# EAGLE board GUN PCB - BOARD (EAGLE 9.7.0)
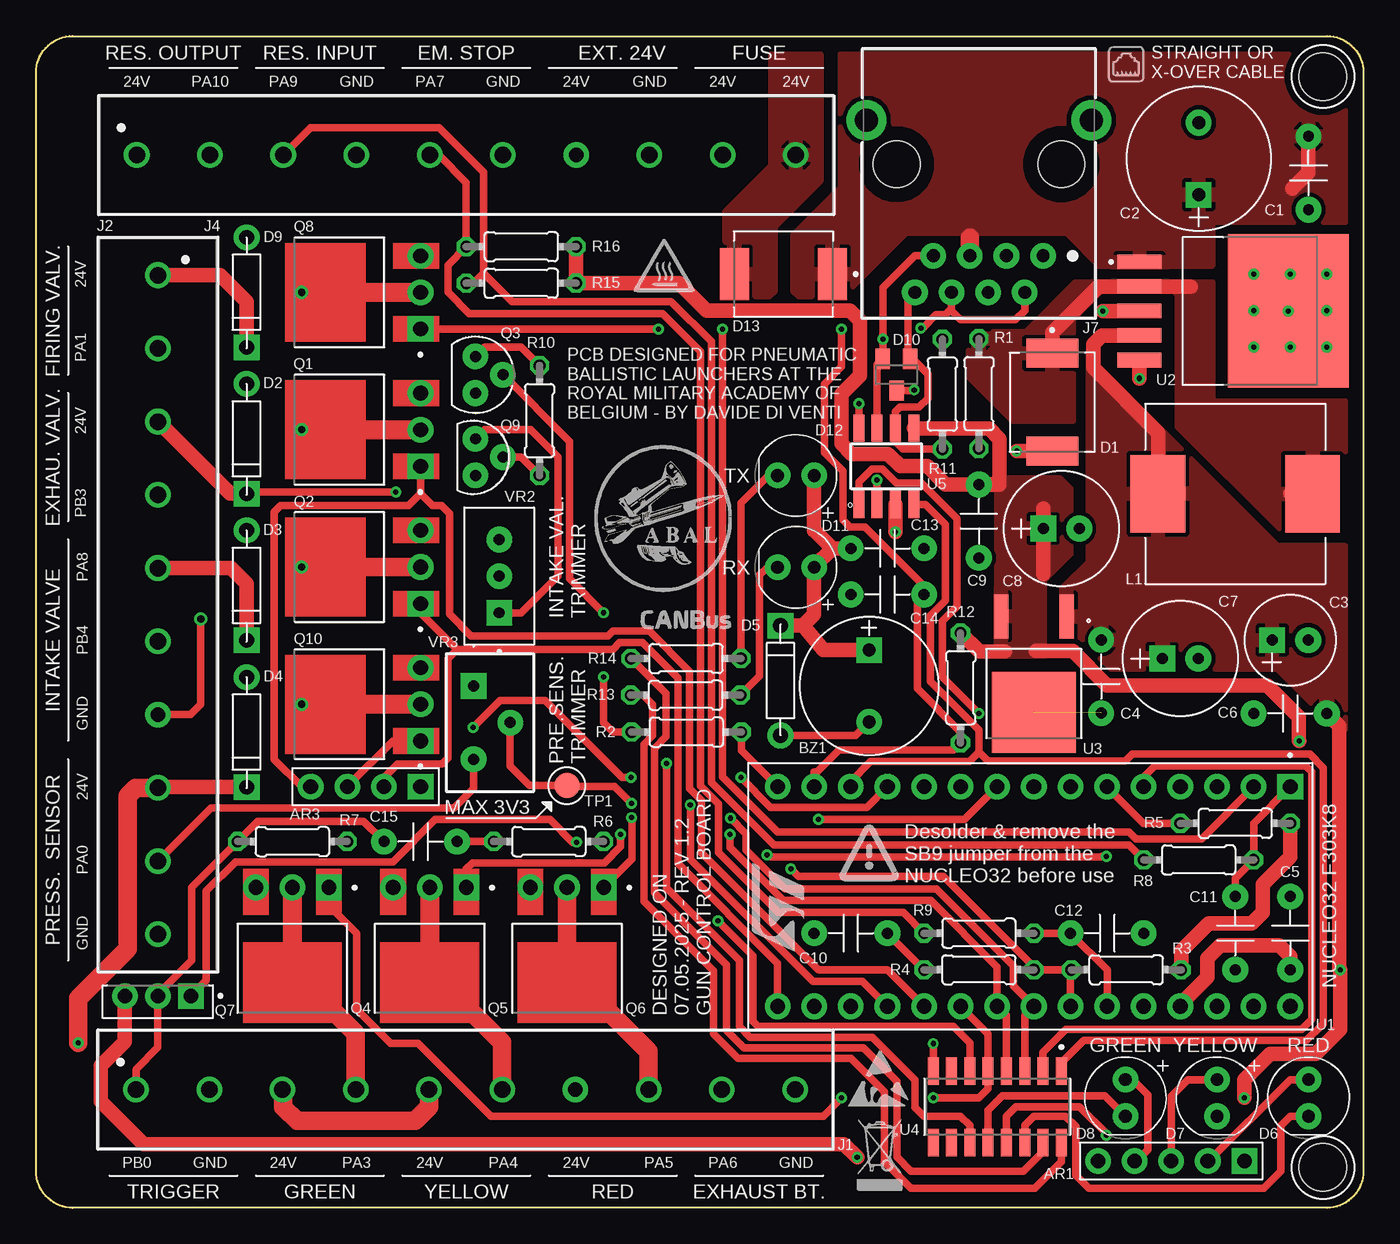
[diagram p0: board, top side]
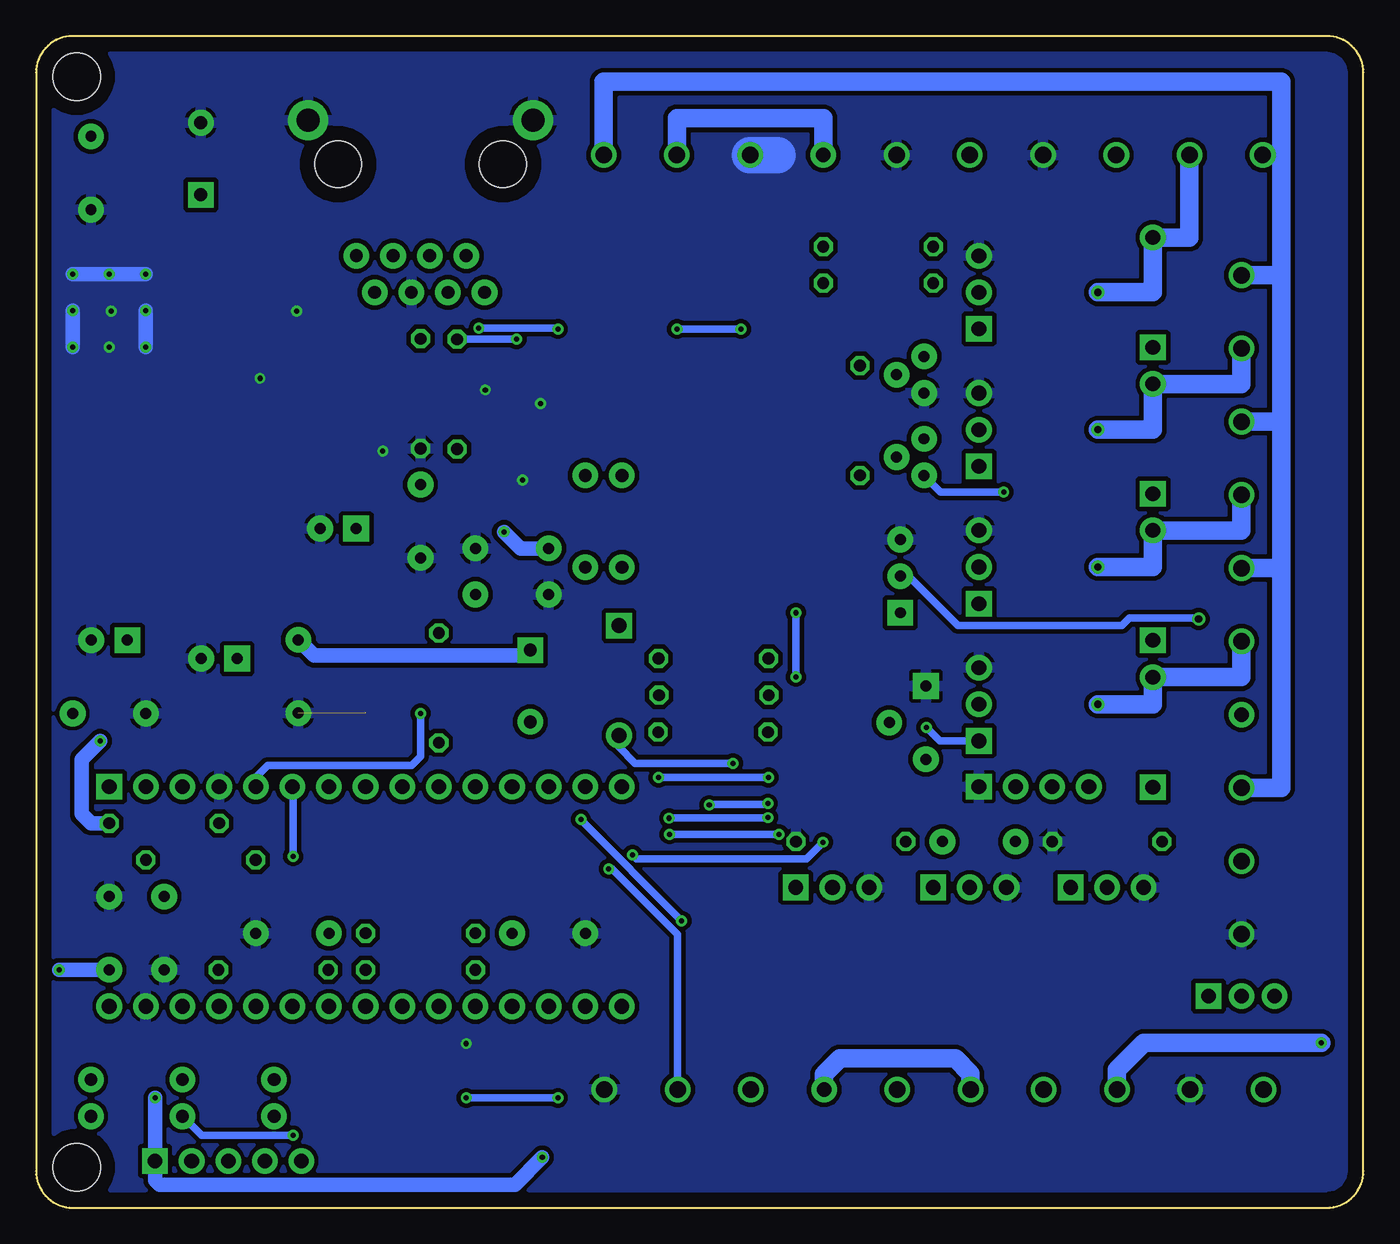
[diagram p1: board, bottom side, seen from below]

Size 92.08 x 81.28 mm. Coordinates in mm from the lower left corner, seen from the top.
Outline: 0,2.54 0,78.74 arc-90 2.54,81.28 89.53,81.28 arc-90 92.08,78.74 92.08,2.54 arc-90 89.53,0 2.54,0 arc-90 0,2.54
Copper layers (1*16): Top / Bottom
Stack-up Default Layer Stack: Top User Defined 0.035mm / Dielectric-1 User Defined 1.5mm / Bottom User Defined 0.035mm
Design rules: minimum copper width 6mil, minimum drill size 0.35mm, copper clearance wire_polygon to wire_polygon 6mil, copper clearance wire_polygon to pad_smd 6mil, copper clearance wire_polygon to via 6mil, copper clearance pad_smd to pad_smd 6mil, copper clearance pad_smd to via 6mil, copper clearance via to via 6mil, copper clearance smd to pad (same net) 6mil, copper clearance smd to via (same net) 6mil, copper clearance smd to smd (same net) 6mil, dimension clearance 40mil, via restrict clearance 0mil, restrict clearance 0mil, drill distance 6mil, keepout clearance 0mil
Holes 3.3 mm at 89.27,78.47 89.27,2.81

## Footprints (pad centres in the part's own frame; a part is rotated, then mirrored left to right if it is on the bottom)
470 = drill 1.016 pad 1.778 square: 1 -5.08,0 | drill 1.016 pad 1.778: 2 -2.54,0; 3 0,0; 4 2.54,0; 5 5.08,0
10K = drill 1.016 pad 1.778 square: 1 -3.81,0 | drill 1.016 pad 1.778: 2 -1.27,0; 3 1.27,0; 4 3.81,0
XDCR_KSSG1201-16 = drill 0.889 pad 1.778: N 2.489,0 | drill 0.889 pad 1.778 square: P -2.489,0
CAPRR508W50L508T317H508 = drill 0.762 pad 1.778: 1 -2.54,0; 2 2.54,0
CAPPRD500W60D1000H2000 = drill 0.889 pad 1.778: N 2.5,0 | drill 0.889 pad 1.778 square: P -2.5,0
CAPPRD250W50D630H1120 = drill 0.762 pad 1.778: N 1.25,0 | drill 0.762 pad 1.778 square: P -1.25,0
CAPPRD250W45D800H500 = drill 0.762 pad 1.778: N 1.25,0 | drill 0.762 pad 1.778 square: P -1.25,0
DIO_SS34 = smd 2 x 3.6: A 3.4,0; C -3.4,0
DIOAD1060W80L520D270 = drill 1.016 pad 1.778: A 3.81,0 | drill 1.016 pad 1.778 square: C -3.81,0
LEDRD254W60D565H860B_R = drill 0.889 pad 1.778: A -1.27,0; C 1.27,0
LEDRD254W60D565H860B_Y = drill 0.889 pad 1.778: A -1.27,0; C 1.27,0
LEDRD254W60D565H860B_W = drill 0.889 pad 1.778: A -1.27,0; C 1.27,0
SOT23 = smd 1 x 1.4: 1 -0.95,-1.1; 2 0.95,-1.1; 3 0,1.1
691241510010 = drill 1.143 pad 1.778: 1 -22.86,0; 2 -17.78,0; 3 -12.7,0; 4 -7.62,0; 5 -2.54,0; 6 2.54,0; 8 12.7,0; 9 17.78,0; 10 22.86,0 | drill 1.016 pad 1.778: 7 7.62,0
615008140121 = drill 0.889 pad 1.778: 1 -4.445,6.35; 2 -3.175,8.89; 3 -1.905,6.35; 4 -0.635,8.89; 5 0.635,6.35; 6 1.905,8.89; 8 4.445,8.89 | drill 0.9 pad 1.778: 7 3.175,6.35 | drill 1.6 pad 2.794: S1 -7.8,-3.05; S2 7.8,-3.05 | hole 3.25: -5.715,0; 5.715,0
INDP125125X600N = smd 3.81 x 5.4: 1 -5.358,0; 2 5.358,0
TRANS_IRF520NSTRL = drill 1.016 pad 1.778 square: 1 -2.54,-5.715 | drill 1.016 pad 1.778: 2 0,-5.715; 3 2.54,-5.715
TO92 = drill 0.762 pad 1.778: 1 1.27,0; 2 0,1.905; 3 -1.27,0
TO229P673X239X978-3N = drill 1.016 pad 1.778 square: 1 -2.29,-0.407 | drill 1.016 pad 1.778: 2 0,-0.407; 3 2.29,-0.407
TO92254P460H750-3 = drill 0.762 pad 1.778: 1 -1.27,0; 2 0,1.905; 3 1.27,0
0204/7 = drill 0.813 octagon: 1 -3.81,0; 2 3.81,0
TP355X200 = smd 1.778 x 1.778: 1 0,0
MODULE_NUCLEO-F042K6 = drill 1.016 pad 1.778 square: CN3_1 -7.62,16.256 | drill 1.016 pad 1.778: CN3_2 -7.62,13.716; CN3_3 -7.62,11.176; CN3_4 -7.62,8.636; CN3_5 -7.62,6.096; CN3_6 -7.62,3.556; CN3_7 -7.62,1.016; CN3_8 -7.62,-1.524; CN3_9 -7.62,-4.064; CN3_10 -7.62,-6.604; CN3_11 -7.62,-9.144; CN3_12 -7.62,-11.684; CN3_13 -7.62,-14.224; CN3_14 -7.62,-16.764; CN3_15 -7.62,-19.304; CN4_1 7.62,16.256; CN4_2 7.62,13.716; CN4_3 7.62,11.176; CN4_4 7.62,8.636; CN4_5 7.62,6.096; CN4_6 7.62,3.556; CN4_7 7.62,1.016; CN4_8 7.62,-1.524; CN4_9 7.62,-4.064; CN4_10 7.62,-6.604; CN4_11 7.62,-9.144; CN4_12 7.62,-11.684; CN4_13 7.62,-14.224; CN4_14 7.62,-16.764; CN4_15 7.62,-19.304
CONV_LM2596DSADJG = smd 3.05 x 1.016: 1 -6.485,3.404; 2 -6.485,1.702; 3 -6.485,0; 4 -6.485,-1.702; 5 -6.485,-3.404 | smd 8.38 x 10.66: 6 3.82,0
DPAK = smd 3.048 x 1.016: 1 -5.47,2.28; 3 -5.47,-2.28 | smd 5.588 x 5.842: 2 1.2,0
SOIC127P600X175-16N = smd 1.905 x 0.762: 1 -2.475,4.445; 2 -2.475,3.175; 3 -2.475,1.905; 4 -2.475,0.635; 5 -2.475,-0.635; 6 -2.475,-1.905; 7 -2.475,-3.175; 8 -2.475,-4.445; 9 2.475,-4.445; 10 2.475,-3.175; 11 2.475,-1.905; 12 2.475,-0.635; 13 2.475,0.635; 14 2.475,1.905; 15 2.475,3.175; 16 2.475,4.445
SOIC127P600X175-8N = smd 1.905 x 0.762: 1 -2.65,1.905; 2 -2.65,0.635; 3 -2.65,-0.635; 4 -2.65,-1.905; 5 2.65,-1.905; 6 2.65,-0.635; 7 2.65,0.635; 8 2.65,1.905
TRIM_3296W-1-502 = drill 0.762 pad 1.778 square: 1 -2.54,0 | drill 0.762 pad 1.778: 2 0,0; 3 2.54,0
3299Y1104LF = drill 0.762 pad 1.778 square: 1 0,0 | drill 0.762 pad 1.778: 2 2.54,-2.54; 3 0,-5.08

## Placement (x,y rotation side)
AR1  470  [470]  78.74,3.25 180 top
AR3  10K10KX4  [10K]  22.86,29.21 180 top
BZ1  KSSG1201-16  [XDCR_KSSG1201-16]  57.78,36.2 270 top
C1  SR211C104KARTR1  [CAPRR508W50L508T317H508]  88.27,71.78 90 top
C2  ECA2CHG220  [CAPPRD500W60D1000H2000]  80.64,72.77 90 top
C3  EEUFC1E101SH  [CAPPRD250W50D630H1120]  86.99,39.37 0 top
C4  SR211C104KARTR1  [CAPRR508W50L508T317H508]  73.89,36.86 90 top
C5  SR211C104KARTR1  [CAPRR508W50L508T317H508]  86.99,19.05 270 top
C6  SR211C104KARTR1  [CAPRR508W50L508T317H508]  86.99,34.29 0 top
C7  ECEA1VKS470  [CAPPRD250W45D800H500]  79.38,38.1 0 top
C8  ECEA1VKS470  [CAPPRD250W45D800H500]  71.12,47.12 0 top
C9  SR211C104KARTR1  [CAPRR508W50L508T317H508]  65.41,47.62 90 top
C10  SR211C104KARTR1  [CAPRR508W50L508T317H508]  56.52,19.05 0 top
C11  SR211C104KARTR1  [CAPRR508W50L508T317H508]  83.19,19.05 90 top
C12  SR211C104KARTR1  [CAPRR508W50L508T317H508]  74.3,19.05 180 top
C13  SR211C104KARTR1  [CAPRR508W50L508T317H508]  59.05,45.75 180 top
C14  SR211C104KARTR1  [CAPRR508W50L508T317H508]  59.05,42.55 0 top
C15  SR211C104KARTR1  [CAPRR508W50L508T317H508]  26.67,25.4 180 top
D1  SS34  [DIO_SS34]  70.48,55.88 270 top
D2  1N4007  [DIOAD1060W80L520D270]  14.61,53.34 90 top
D3  1N4007  [DIOAD1060W80L520D270]  14.61,43.18 90 top
D4  1N4007  [DIOAD1060W80L520D270]  14.61,32.99 90 top
D5  1N4007  [DIOAD1060W80L520D270]  51.64,36.58 270 top
D6  LED_RADIALRED  [LEDRD254W60D565H860B_R]  88.27,7.62 270 top
D7  LED_RADIALYELLOW  [LEDRD254W60D565H860B_Y]  81.91,7.62 270 top
D8  LED_RADIALWHITE  [LEDRD254W60D565H860B_W]  75.56,7.62 270 top
D9  1N4007  [DIOAD1060W80L520D270]  14.61,63.5 90 top
D10  SM712.TCT  [SOT23]  59.69,57.78 180 top
D11  LED_RADIALYELLOW  [LEDRD254W60D565H860B_Y]  52.7,44.42 180 top
D12  LED_RADIALYELLOW  [LEDRD254W60D565H860B_Y]  52.7,50.8 180 top
D13  SS34  [DIO_SS34]  51.85,64.77 180 top
J1  691241510010  [691241510010]  29.79,8.2 0 top
J2  691241510010  [691241510010]  29.85,73.03 0 top
J4  691241510010  [691241510010]  8.46,41.83 270 top
J7  615008140121  [615008140121]  65.41,72.39 180 top
L1  SRR1260-330M  [INDP125125X600N]  83.19,49.53 0 top
Q1  IRF520NSTRL  [TRANS_IRF520NSTRL]  20.96,53.98 90 top
Q2  IRF520NSTRL  [TRANS_IRF520NSTRL]  20.96,44.45 90 top
Q3  BC547  [TO92]  30.48,57.78 270 top
Q4  IRF520NSTRL  [TRANS_IRF520NSTRL]  17.78,16.51 180 top
Q5  IRF520NSTRL  [TRANS_IRF520NSTRL]  27.3,16.51 180 top
Q6  IRF520NSTRL  [TRANS_IRF520NSTRL]  36.83,16.51 180 top
Q7  IRFU9220  [TO229P673X239X978-3N]  8.45,14.29 180 top
Q8  IRF520NSTRL  [TRANS_IRF520NSTRL]  20.96,63.5 90 top
Q9  BC557B  [TO92254P460H750-3]  30.48,52.07 270 top
Q10  IRF520NSTRL  [TRANS_IRF520NSTRL]  20.96,34.92 90 top
R1  10k  [0204/7]  65.41,56.47 270 top
R2  2.2k  [0204/7]  45.11,32.99 180 top
R3  1k  [0204/7]  75.62,16.51 0 top
R4  1k  [0204/7]  65.41,16.51 0 top
R5  2.2k  [0204/7]  83.19,26.67 0 top
R6  1k  [0204/7]  35.56,25.4 180 top
R7  1k  [0204/7]  17.78,25.4 180 top
R8  1k  [0204/7]  80.64,24.13 180 top
R9  1k  [0204/7]  65.41,19.05 180 top
R10  2.2k  [0204/7]  34.92,54.61 270 top
R11  120  [0204/7]  62.86,56.44 90 top
R12  1k  [0204/7]  64.14,36.07 270 top
R13  330  [0204/7]  45.06,35.56 0 top
R14  330  [0204/7]  45.08,38.1 0 top
R15  10k  [0204/7]  33.66,64.14 0 top
R16  10k  [0204/7]  33.66,66.67 0 top
TP1  TP  [TP355X200]  36.83,29.29 0 top
U1  NUCLEO-F042K6  [MODULE_NUCLEO-F042K6]  70.74,21.59 270 top
U2  LM2596DSADJG  [CONV_LM2596DSADJG]  83.03,62.21 0 top
U3  LD39150DT33-R  [DPAK]  69.22,35.56 270 top
U4  ULN2003LVDR  [SOIC127P600X175-16N]  66.67,7.01 270 top
U5  MCP2562-E/SN  [SOIC127P600X175-8N]  58.98,51.44 90 top
VR2  3296W-1-502  [TRIM_3296W-1-502]  32.13,43.81 90 top
VR3  3299Y-1-104LF  [3299Y1104LF]  30.35,36.2 0 top

## Library data of the parts
AR1 = Network resistors 470 x4
AR3 = Network resistors 10k x3
BZ1 = Buzzer; AVAILABILITY: In Stock; CHECK_PRICES: https://www.snapeda.com/parts/KSSG1201-16/Kingstate/view-part/?ref=eda; DESCRIPTION: MAGNETIC TRANSDUCER, PCB; Transducer Function:Buzzer; Supply Voltage Min:1V; Supply Voltage Max:-; Current Rating:35mA; Tones:-; Sound Level SPL:85dB; Resonant Frequency:2kHz; Transducer Mounting:-; Product Range:-; SVHC:No SVHC RoHS Compliant: Yes; MF: Kingstate; MP: KSSG1201-16; PACKAGE: None; PRICE: None; SNAPEDA_LINK: https://www.snapeda.com/parts/KSSG1201-16/Kingstate/view-part/?ref=snap
C1 C4-C6 C9-C15 = 100nF; AVAILABILITY: In Stock; CHECK_PRICES: https://www.snapeda.com/parts/SR211C104KARTR1/AVX/view-part/?ref=eda; DESCRIPTION: 0.1 µF ±10% 100V Ceramic Capacitor X7R Radial; MF: AVX; MP: SR211C104KARTR1; PACKAGE: Radial AVX Interconnect / Elco; PRICE: None; SNAPEDA_LINK: https://www.snapeda.com/parts/SR211C104KARTR1/AVX/view-part/?ref=snap
C2 = 680uF 35V; AVAILABILITY: In Stock; CHECK_PRICES: https://www.snapeda.com/parts/ECA2CHG220/Panasonic/view-part/?ref=eda; DESCRIPTION: Capacitor; Alum Electrolytic; Cap 22 uF; Tol 20%; Vol-Rtg 160 VDC; Radial; 10x20; Bulk; MF: Panasonic; MP: ECA2CHG220; PACKAGE: RADIAL-2 Panasonic; PRICE: None; SNAPEDA_LINK: https://www.snapeda.com/parts/ECA2CHG220/Panasonic/view-part/?ref=snap
C3 = 220uF 10V; AVAILABILITY: In Stock; CHECK_PRICES: https://www.snapeda.com/parts/EEU-FC1E101SH/Panasonic/view-part/?ref=eda; DESCRIPTION: Capacitor,Alum Lytic,Cap 100 uF,Tol 20%,Vol-Rtg 25 VDC,Radial,6.3x11,Tape&Box | Panasonic Electronic Components EEU-FC1E101SH; MF: Panasonic; MP: EEU-FC1E101SH; PACKAGE: RADIAL-2 Panasonic; PRICE: None; SNAPEDA_LINK: https://www.snapeda.com/parts/EEU-FC1E101SH/Panasonic/view-part/?ref=snap
C7 C8 = 100uF 25V; AVAILABILITY: In Stock; CHECK_PRICES: https://www.snapeda.com/parts/ECE-A1VKS470/Panasonic/view-part/?ref=eda; DESCRIPTION: Capacitor,Alum Electrolytic,Cap 47 uF,Tol 20%,Vol-Rtg 35 VDC,Radial,8x5,Bulk | Panasonic Electronic Components ECE-A1VKS470; MF: Panasonic; MP: ECE-A1VKS470; PACKAGE: RADIAL-2 Panasonic; PRICE: None; SNAPEDA_LINK: https://www.snapeda.com/parts/ECE-A1VKS470/Panasonic/view-part/?ref=snap
D1 D13 = SS34; AVAILABILITY: In Stock; CHECK_PRICES: https://www.snapeda.com/parts/SS34/taiwan/view-part/?ref=eda; DESCRIPTION: 3A, 40V, Schottky Rectifier; MF: Taiwan Semiconductor; MP: SS34; PACKAGE: DO-214AB-2 Taiwan Semiconductor; PRICE: None; SNAPEDA_LINK: https://www.snapeda.com/parts/SS34/taiwan/view-part/?ref=snap
D2-D5 D9 = 1N4007; AVAILABILITY: In Stock; CHECK_PRICES: https://www.snapeda.com/parts/1N4007/Diotec/view-part/?ref=eda; DESCRIPTION: Diode, DO-41, 1000V, 1A, 175°C; MF: Diotec Semiconductor; MP: 1N4007; PACKAGE: DO-41 Diotec; PRICE: None; SNAPEDA_LINK: https://www.snapeda.com/parts/1N4007/Diotec/view-part/?ref=snap
D6-D8 D11 D12 = LED
D10 = SM712; AVAILABILITY: In Stock; CHECK_PRICES: https://www.snapeda.com/parts/SM712.TCT/Semtech/view-part/?ref=eda; DESCRIPTION: SM Series 12 V 400 W Asymmetrical TVS Diode for Extended Common-Mode - SOT-23; MF: Semtech Corporation; MP: SM712.TCT; PACKAGE: SOT-23 Semtech; PRICE: None; SNAPEDA_LINK: https://www.snapeda.com/parts/SM712.TCT/Semtech/view-part/?ref=snap
J1 J2 J4 = Bornier 10 contacts; AVAILABILITY: In Stock; CHECK_PRICES: https://www.snapeda.com/parts/691241510010/W%25C3%25BCrth+Elektronik+Midcom/view-part/?ref=eda; DESCRIPTION: 10 Position Wire to Board Terminal Block Horizontal with Board 0.200 (5.08mm) Through Hole; MF: Würth Elektronik; MP: 691241510010; PACKAGE: None; PRICE: None; SNAPEDA_LINK: https://www.snapeda.com/parts/691241510010/W%25C3%25BCrth+Elektronik+Midcom/view-part/?ref=snap
J7 = Ethernet connector; AVAILABILITY: In Stock; CHECK_PRICES: https://www.snapeda.com/parts/615008140121/Wurth+Electronics/view-part/?ref=eda; DESCRIPTION: ModularJack_8P8C_THT_Horizontal_Shielded_Tab Down; MF: Wurth Elektronik; MP: 615008140121; PACKAGE: None; PRICE: None; SNAPEDA_LINK: https://www.snapeda.com/parts/615008140121/Wurth+Electronics/view-part/?ref=snap
L1 = 33uH 3A; AVAILABILITY: In Stock; CHECK_PRICES: https://www.snapeda.com/parts/SRR1260-330M/Bourns/view-part/?ref=eda; DESCRIPTION: 33 µH Shielded Drum Core, Wirewound Inductor 3 A 60mOhm Max Nonstandard; MF: Bourns - J.W. Miller; MP: SRR1260-330M; PACKAGE: Nonstandard Bourns - J.W. Miller; PRICE: None; SNAPEDA_LINK: https://www.snapeda.com/parts/SRR1260-330M/Bourns/view-part/?ref=snap
Q1 Q2 Q4-Q6 Q8 Q10 = IRF520N SMD/DIP; AVAILABILITY: In Stock; CHECK_PRICES: https://www.snapeda.com/parts/IRF520NSTRL/Infineon/view-part/?ref=eda; DESCRIPTION: N-Channel 100 V 9.7A (Tc) 3.8W (Ta), 48W (Tc) Surface Mount D2PAK; MF: Infineon Technologies; MP: IRF520NSTRL; PACKAGE: None; PRICE: None; SNAPEDA_LINK: https://www.snapeda.com/parts/IRF520NSTRL/Infineon/view-part/?ref=snap
Q3 = BC547; AVAILABILITY: In Stock; CHECK_PRICES: https://www.snapeda.com/parts/BC547/Onsemi/view-part/?ref=eda; DESCRIPTION: Trans GP BJT NPN 45V 0.1A 500mW 3-Pin TO-92 T/R; MF: ON Semiconductor; MP: BC547; PACKAGE: None; PRICE: None; SNAPEDA_LINK: https://www.snapeda.com/parts/BC547/Onsemi/view-part/?ref=snap
Q7 = IRFU9220; AVAILABILITY: In Stock; CHECK_PRICES: https://www.snapeda.com/parts/IRFU9310PBF/Vishay/view-part/?ref=eda; DESCRIPTION: P-Channel 400 V 1.8A (Tc) 50W (Tc) Through Hole TO-251AA; MF: Vishay Siliconix; MP: IRFU9310PBF; PACKAGE: TO-251 Vishay; PRICE: None; SNAPEDA_LINK: https://www.snapeda.com/parts/IRFU9310PBF/Vishay/view-part/?ref=snap
Q9 = BC557B; AVAILABILITY: In Stock; CHECK_PRICES: https://www.snapeda.com/parts/BC557B/Diotec/view-part/?ref=eda; DESCRIPTION: BJT, TO-92, 45V, 100mA, PNP, 0.5W, 150°C; MF: Diotec Semiconductor; MP: BC557B; PACKAGE: TO-92 Diotec; PRICE: None; SNAPEDA_LINK: https://www.snapeda.com/parts/BC557B/Diotec/view-part/?ref=snap
R1-R16 = rcl; SPICEPREFIX: R
TP1 = PROBE_POINT; AVAILABILITY: In Stock; CHECK_PRICES: https://www.snapeda.com/parts/RCW0C/TE+Connectivity/view-part/?ref=eda; DESCRIPTION: TEST POINT, 1206 CASE SIZE; Accessory Type:SMD Circuit Probe Pad; For Use With:-; SVHC:No SVHC (27-Jun-2018); Board Connector / Footprint:Test Point; Current Rating:2A; External Depth:1.6mm; External Length / Height:2mm; External Width:2.3mm; Height:2mm; Operating Temperature Max:125°C; Operating Temperature Min:-55°C; Product Range:Tyco RC Series; MF: TE Connectivity; MP: RCW0C; PACKAGE: None; PRICE: None; SNAPEDA_LINK: https://www.snapeda.com/parts/RCW0C/TE+Connectivity/view-part/?ref=snap
U1 = NUCLEO-F303K8; AVAILABILITY: In Stock; CHECK_PRICES: https://www.snapeda.com/parts/NUCLEO-F042K6/STMicroelectronics/view-part/?ref=eda; DESCRIPTION: STM32F042K6, mbed-Enabled Development Nucleo-32 STM32F0 ARM® Cortex®-M0 MCU 32-Bit Embedded Evaluation Board; MF: STMicroelectronics; MP: NUCLEO-F042K6; PACKAGE: None; PRICE: None; SNAPEDA_LINK: https://www.snapeda.com/parts/NUCLEO-F042K6/STMicroelectronics/view-part/?ref=snap
U2 = LM2596; AVAILABILITY: In Stock; CHECK_PRICES: https://www.snapeda.com/parts/LM2596DSADJG/Onsemi/view-part/?ref=eda; DESCRIPTION: LM2596DSADJG Switching Regulator 3A Adjustable, 1.23 to 37 V, 5-Pin D2PAK | ON Semiconductor LM2596DSADJG; MF: ON Semiconductor; MP: LM2596DSADJG; PACKAGE: D2PAK-5 ON Semiconductor; PRICE: None; SNAPEDA_LINK: https://www.snapeda.com/parts/LM2596DSADJG/Onsemi/view-part/?ref=snap
U3 = 3V3 regulator; AVAILABILITY: In Stock; CHECK_PRICES: https://www.snapeda.com/parts/IPB60R165CP/Infineon/view-part/?ref=eda; DESCRIPTION: N-Channel 600 V 21A (Tc) 192W (Tc) Surface Mount PG-TO263-3-2; MF: Infineon; MP: IPB60R165CP; PACKAGE: TO-263 Infineon; PRICE: None; SNAPEDA_LINK: https://www.snapeda.com/parts/IPB60R165CP/Infineon/view-part/?ref=snap
U4 = ULN2003; AVAILABILITY: In Stock; CHECK_PRICES: https://www.snapeda.com/parts/ULN2003LVDR/Texas+Instruments/view-part/?ref=eda; DESCRIPTION: 50-V, 7-ch NMOS array low-side driver; MF: Texas Instruments; MP: ULN2003LVDR; PACKAGE: SOIC-16 Texas Instruments; PRICE: None; SNAPEDA_LINK: https://www.snapeda.com/parts/ULN2003LVDR/Texas+Instruments/view-part/?ref=snap
U5 = MCP2562; AVAILABILITY: In Stock; CHECK_PRICES: https://www.snapeda.com/parts/MCP2562-E/SN/Microchip/view-part/?ref=eda; DESCRIPTION: Microchip MCP2562-E/SN,CAN Transceiver 1MBps 1-channel IEC 61000-4-2,8-Pin SOIC | Microchip Technology Inc. MCP2562-E/SN; MF: Microchip; MP: MCP2562-E/SN; PACKAGE: SO-8 Microchip; PRICE: None; SNAPEDA_LINK: https://www.snapeda.com/parts/MCP2562-E/SN/Microchip/view-part/?ref=snap
VR2 = Trimmer 1k; AVAILABILITY: In Stock; CHECK_PRICES: https://www.snapeda.com/parts/3296W-1-502/Bourns/view-part/?ref=eda; DESCRIPTION: NON-RoHS, 3/8 Sq, Thru-Hole, TRIMMER, 5 Kohms, Cermet, 25 Turns, Pwr-Rtg 0.5W | Bourns 3296W-1-502; MF: Bourns; MP: 3296W-1-502; PACKAGE: NON STANDARD-3 Bourns; PRICE: None; SNAPEDA_LINK: https://www.snapeda.com/parts/3296W-1-502/Bourns/view-part/?ref=snap
VR3 = Trimmer 10k; AVAILABILITY: In Stock; CHECK_PRICES: https://www.snapeda.com/parts/3299Y-1-104LF/Bourns/view-part/?ref=eda; DESCRIPTION: Trimmer, Cermet, Rest 100 Kilohms, PCB, 25 Turns, Pwr-Rtg 0.5W | Bourns 3299Y-1-104LF; MF: Bourns; MP: 3299Y-1-104LF; PACKAGE: DIP-3 Bourns; PRICE: None; SNAPEDA_LINK: https://www.snapeda.com/parts/3299Y-1-104LF/Bourns/view-part/?ref=snap

## Nets
24V: D2.C D3.C D4.C D9.C D13.A J1.3 J1.5 J1.7 J2.1 J2.10 J4.1 J4.3 J4.5 J4.8 Q9.3
24V_+: J2.7 J2.9
24V_SAFE: C1.2 C2.P D13.C J7.5 U2.1
+3.3V: C8.P C9.2 R3.2 R5.2 R12.1 R15.2 R16.2 U3.3 U5.5
+3V3: U1.CN4_14
+5V: AR1.1 BZ1.P C3.P C4.2 C5.2 C6.2 C7.P C13.2 D5.C D11.A D12.A L1.1 Q7.3 U1.CN4_4 U2.4 U3.1 U5.3
BUZZER: BZ1.N D5.A U4.11
CANH: D10.2 J7.7 R11.2 U5.7
CANL: D10.1 J7.8 R11.1 U5.6
CANRX_LED: R13.1 U4.16
CANTX_LED: R14.1 U4.15
ELECTROMAGNET_2: D9.A J2.2 Q8.2
EM.STOP_1: J2.5 R9.2 R16.1
END.STOP_1: J2.3 R8.2 R15.1
EXHAUST_2: D3.A J4.4 Q2.2
FIRING_2: D2.A J4.2 Q1.2
GND: AR3.1 C1.1 C2.N C3.N C4.1 C5.1 C6.1 C7.N C8.N C9.1 C10.1 C11.1 C12.1 C13.1 C14.1 D1.A D10.3 J1.2 J1.10 J2.4 J2.6 J2.8 J4.10 J7.4 J7.S1 J7.S2 Q1.3 Q2.3 Q3.1 Q4.3 Q5.3 Q6.3 Q8.3 Q10.3 R1.2 R6.1 R7.1 U1.CN3_4 U1.CN4_2 U2.3 U2.5 U2.6 U3.2 U4.8 U5.2 U5.8 VR2.3 VR3.1
GREEN_2: J1.4 Q4.2
INT2: J7.3
INT4: J7.1
INTAKE_PWR_PWM: D4.A J4.6 Q10.2
INTAKE_TTL_PWM: J4.7 VR2.2
LED_GREEN: D8.C U4.12
LED_RED: D6.C U4.14
LED_YELLOW: D7.C U4.13
N$2: D1.C L1.2 R1.1 U2.2
N$3: Q3.2 R2.2
N$4: C15.1 R6.2
N$5: Q3.3 R10.1
N$6: Q9.2 R10.2
N$7: Q9.1 VR2.1
N$8: C10.2 R4.1
N$19: U4.7
N$21: AR1.2 D6.A
N$22: AR1.4 D8.A
N$23: AR1.3 D7.A
N$29: U4.10
N$36: D11.C R13.2
N$37: D12.C R14.2
PA0_PRESSURE-SENSOR: TP1.1 U1.CN4_12 VR3.2
PA1_FIRING-VALVE: AR3.4 Q1.1 U1.CN4_11
PA2: U1.CN4_5
PA3_LED-GREEN: Q4.1 U1.CN4_10 U4.5
PA4_LED-YELLOW: Q5.1 U1.CN4_9 U4.4
PA5_LED-RED: Q6.1 U1.CN4_8 U4.3
PA6_EXHAUST-BUTTON: J1.9 R3.1 R4.2 U1.CN4_7
PA7_EM.STOP: C12.2 R9.1 U1.CN4_6
PA8_PWR-INTAKE-VALVE: AR3.3 Q10.1 U1.CN3_12
PA9_RESERVED-INPUT: C11.2 R8.1 U1.CN3_1
PA10_RESREVED-OUTPUT: Q8.1 U1.CN3_2
PA11_CANRX: U1.CN3_13 U4.1 U5.4
PA12_CANTX: U1.CN3_5 U4.2 U5.1
PB0_TRIGGER: Q7.1 R5.1 U1.CN3_6
PB1_BUZZER: U1.CN3_9 U4.6
PB3_EXHAUST-VALVE: AR3.2 Q2.1 U1.CN4_15
PB4_PWM-INTAKE-VALVE: R2.1 U1.CN3_15
PB5_INT-EM.STOP: C14.2 J7.2 J7.6 R12.2 U1.CN3_14
PB6: U1.CN3_8
PB7: U1.CN3_7
PF0: U1.CN3_10
PF1: U1.CN3_11
PRESSURE_2: J4.9 VR3.3
RED_2: J1.8 Q6.2
TRIGGER_1: C15.2 J1.1 Q7.2 R7.2
VIN: U1.CN4_1
YELLOW_2: J1.6 Q5.2

## Tracks (layer width: path | path; a pad name or v marks a point on that pad's centre or on a via)
24V  (via drill 0.35)
  Top 0.508: D2.C 14.73,49.66 v24.96,49.66
  Top 1.016: D9.C 14.61,62.87 12.78,64.69 J4.1 | D2.C 13.46,49.53 J4.3 | D3.C 14.61,43.31 13.54,44.37 J4.5 | D4.C 8.51,29.18 J4.8
  Top 1.27: J1.3 17.14,8.15 17.14,6.99 18.1,6.03 26.29,6.03 27.25,7 J1.5 | J4.8 6.91,29.13 6.35,28.57 6.35,17.96 2.92,14.53 v2.92,11.43
  Bottom 0.508: v24.96,49.66 29.34,49.66 Q9.3
  Bottom 1.27: 8.38,64.77 J4.1 5.71,64.69 | J1.5 27.25,9.28 28.32,10.35 36.32,10.35 37.41,9.26 J1.7 | v2.92,11.43 15.24,11.43 17.09,9.58 J1.3 | J2.10 52.7,78.11 5.71,78.11 5.71,73.03 | J2.1 5.71,73.03 | 5.71,73.03 5.71,64.69 | 5.71,64.69 5.71,54.53 | J4.3 5.71,54.53 | 5.71,54.53 5.71,44.37 | J4.5 5.71,44.37 | 5.71,44.37 5.71,29.13 J4.8
  pour Top (isolate 0.305): 50.8,80.64 54.61,80.64 54.61,71.12 51.43,67.94 51.43,63.5 50.8,62.87 47.62,62.87 47.62,69.22 50.8,72.39
24V_+
  Bottom 1.27: J2.9 47.62,75.56 37.46,75.56 J2.7
24V_SAFE
  Top 1.016: 87.15,70.69 88.27,71.81 C1.2
  Top 1.27: J7.5 64.77,67.31
  pour Top (isolate 0.305): 55.63,70.42 55.63,80.39 90.8,80.39 91.19,80.01 91.19,68.2 81.79,68.2 81.79,65.15 73.66,65.15 71.37,67.44 58.61,67.44
  pour Top (isolate 0.305): 52.32,63.5 52.96,62.87 55.88,62.87 61.28,68.26 57.15,72.39 52.32,67.56
+3.3V  (via drill 0.35)
  Top 1.016: 69.87,48.51 C8.P 69.87,43.97 | U5.5 60.91,54.05 66.12,54.05 66.83,53.34 66.83,50.16 C9.2 63.09,50.16 61.82,51.44 59.94,51.44 59.08,52.29 56.57,52.29 55.85,53.01 55.85,56.44 57.15,57.73 57.15,61.54 56.46,62.23 46.51,62.23 44.6,64.14 R15.2 R16.2 | 69.36,38.61 71.91,38.61 74.27,36.25 85.42,36.25 87.61,34.06 87.61,32.41 v87.63,32.38 | 67.19,38.59 65.42,38.59 R12.1 | R5.2 86.99,24.33 85.09,22.43 85.09,20.5 84.33,19.74 81.36,19.74 79.43,17.8 R3.2
  Bottom 1.016: R5.2 88.27,26.67 88.9,27.3 88.9,31.11 v87.63,32.38
  pour Top (isolate 0.305): 70.13,38.1 67.31,38.1 66.47,38.94 66.47,50.8 71.12,50.8 71.96,49.96 71.96,45.29 70.13,43.46
+5V  (via drill 0.35)
  Top 1.016: 85.72,39.35 C3.P | C5.2 86.99,17.42 86.23,18.19 82.14,18.19 81.25,17.3 81.25,15.99 79.38,14.11 U1.CN4_4 | U2.4 73.92,60.51 73.33,59.92 73.33,58.27 77.85,53.75 77.85,51.61 | v83.82,7.62 83.82,8.89 85.6,10.67 88.77,10.67 90.47,12.37 v90.47,16.51 90.4,16.59 90.4,33.43 C6.2 | BZ1.P 54.61,38.68 53.21,40.39 | C13.2 55.24,45.74 | 55.24,45.74 53.97,44.48 D11.A 53.97,41.15 53.21,40.39 | U5.3 v59.61,46.89 | Q7.3 6.16,11.52 4.5,9.86 4.5,7.38 7.46,4.42 56.04,4.42 v56.96,3.5 | 55.24,45.74 54,46.99 53.97,46.99 D12.A | D5.C 53.21,40.39
  Bottom 1.016: C5.2 v90.47,16.51 | v83.82,7.62 AR1.1 83.82,1.91 83.52,1.6 58.86,1.6 v56.96,3.5 | v59.61,46.89 58.47,45.74 C13.2 | 53.97,44.2 D11.A | BZ1.P 57.78,38.49 57.97,38.3 72.8,38.3 C4.2
  pour Top (isolate 0.305): 72.82,59.49 86.21,46.1 91.19,46.1 91.19,37.19 72.82,37.19
  pour Top (isolate 0.305): 73.02,45.09 71.12,43.18 71.12,39.37 72.39,39.37 74.3,37.47 74.3,45.09
  pour Top (isolate 0.305): 91.21,37.47 91.21,33.02 90.17,33.02 85.72,37.47
BUZZER  (via drill 0.35)
  Top 0.508: U4.11 64.77,5.71 64.14,6.35 61.59,6.35 60.96,6.99 60.96,8.89 58.01,11.84 49.53,11.84 48.78,12.59 48.78,17.16 43.74,22.2 43.74,30.82 v43.73,30.84 | BZ1.N 56.84,32.77 D5.A
  Bottom 0.508: v43.73,30.84 50.52,30.84 51.64,31.95 D5.A
CANH  (via drill 0.35)
  Top 0.508: D10.2 58.8,58.95 | J7.7 60.96,66.04 58.74,63.82 v58.74,60.25 D10.2 | D10.2 58.34,58.49 U5.7
  Bottom 0.508: R11.2 v58.74,60.25
CANL
  Top 0.508: J7.8 60.48,63.02 60.48,59.05 D10.1 60.64,59.05 61.85,57.85 61.85,56.13 61.24,55.52 59.92,55.52 59.61,55.22 U5.6 59.61,53.14 60.12,52.63 R11.1
CANRX_LED
  Top 0.508: U4.16 71.12,3.17 69.29,1.35 60.68,1.35 58.85,3.17 58.85,8.05 56.54,10.36 48.69,10.36 46.99,12.06 46.99,16.43 42.17,21.26 42.17,32.15 42.77,32.76 42.77,34.9 42.11,35.56 R13.1
CANTX_LED
  Top 0.508: U4.15 69.85,3.9 68.49,2.54 60.7,2.54 59.71,3.52 59.71,8.76 57.38,11.1 49.09,11.1 47.88,12.32 47.88,16.84 42.89,21.83 42.89,31.86 43.71,32.69 43.71,35.66 R14.1
ELECTROMAGNET_2  (via drill 0.5)
  Top 1.27: Q8.2 v18.41,63.5
  Bottom 1.27: J2.2 12.07,67.31 D9.A 14.61,63.5 v18.41,63.5
EM.STOP_1
  Top 0.508: R9.2 60.17,20.48 51.51,20.48 47.35,24.64 47.35,28.01 46.1,29.26 46.1,59.39 43.46,62.03 30.05,62.03 28.57,63.5 28.57,65.41 R16.1 29.85,71.12 27.94,73.03 J2.5
END.STOP_1
  Top 0.508: R8.2 75.79,25.17 51.17,25.17 46.84,29.5 46.84,60.07 44.04,62.87 33.02,62.87 31.05,64.84 | J2.3 19.05,74.93 27.94,74.93 31.04,71.83 31.04,64.85 31.05,64.84 | 31.05,64.84 30.34,64.14 R15.1
EXHAUST_2  (via drill 0.5)
  Top 1.27: Q2.2 v18.41,44.45
  Bottom 1.27: v18.41,44.45 14.61,44.45 D3.A 8.46,46.99 J4.4
FIRING_2  (via drill 0.5)
  Top 1.27: Q1.2 v18.41,53.98
  Bottom 1.27: J4.2 8.46,57.15 D2.A 14.61,53.98 v18.41,53.98
GND  (via drill 0.35)  (1 unrouted)
  Top 0.508: v60.91,56.74 60.86,56.69 D10.3 | v62.23,11.39 U4.8 | U5.8 v57.07,55.78 | v58.32,50.47 58.32,48.81 U5.2
  Top 1.016: U2.6 86.99,62.35 v86.99,64.77 | U2.6 86.85,59.84 v86.99,59.69 | U2.6 87.02,62.21 v89.53,59.69 | v89.53,62.23 v89.53,64.77 | v84.45,64.77 v84.45,62.23 | U2.3 v74,62.21 | v76.54,57.53 U2.5 | v68.02,52.48 D1.A
  Bottom 1.016: v89.53,59.69 v89.53,62.23 | v89.53,64.77 v84.45,64.77 | v84.45,62.23 v84.45,59.69
  Bottom 2.54: J2.8 40.64,73.03
  other vias: 86.85,62.21
  pour Bottom (isolate 0.305): 2.54,0 arc-90 0,2.54 0,78.74 arc-90 2.54,81.28 89.53,81.28 arc-90 92.08,78.74 92.08,2.54 arc-90 89.53,0
  pour Bottom (isolate 0.305): 72.39,10.79 91.44,10.79 91.44,0.64 66.67,0.64 66.67,5.08
GREEN_2
  Top 1.27: Q4.2 17.78,16.51 22.17,12.12 J1.4
  Bottom 1.27: J1.4 22.12,8.26
INTAKE_PWR_PWM  (via drill 0.5)
  Top 1.27: Q10.2 v18.41,34.92
  Bottom 1.27: J4.6 8.46,36.8 D4.A 14.61,34.92 v18.41,34.92
INTAKE_TTL_PWM  (via drill 0.5)
  Top 0.508: J4.7 10.72,34.21 11.43,34.92 v11.43,40.84
  Bottom 0.508: VR2.2 31.55,43.81 28.12,40.39 16.76,40.39 16.26,40.89 11.48,40.89 v11.43,40.84
LED_GREEN
  Top 0.508: D8.C 74.14,7.77 67.04,7.77 66.04,6.77 U4.12
LED_RED
  Top 0.508: D6.C 86.99,6.35 86.34,5.7 86.34,2.54 85.15,1.35 73.02,1.35 72.11,2.26 72.11,5.64 71.4,6.35 69.22,6.35 68.58,5.71 U4.14
LED_YELLOW  (via drill 0.35)
  Top 0.508: U4.13 67.31,6.35 67.97,7.01 72.36,7.01 74.3,5.08 v74.24,5.03
  Bottom 0.508: v74.24,5.03 80.59,5.03 D7.C
N$2
  Top 1.016: 80.11,63.91 U2.2 73.69,63.91 70.48,60.71 D1.C 70.12,59.65 | 86.99,49.53 L1.2
  pour Top (isolate 0.305): 86.23,46.86 91.19,46.86 91.19,56.13 81.79,56.13 81.79,64.39 72.01,64.39 68.58,60.96 64.52,60.96 64.52,57.53 67.64,54.41 72.14,54.41 72.14,61.59 74.17,63.63 78.61,63.63 78.99,63.25 78.99,54.1
N$3  (via drill 0.35)
  Top 0.508: Q3.2 37.01,53.16 37.01,43.64 v39.37,41.27 | R2.2 40.03,32.99 39.37,33.66 v39.37,36.83
  Bottom 0.508: v39.37,36.83 v39.37,41.27
N$4
  Top 0.508: R6.2 C15.1
N$5
  Top 0.508: R10.1 33.66,59.69 31.12,59.69 Q3.3
N$6
  Top 0.508: Q9.2 33.66,52.07 R10.2
N$7
  Top 0.508: Q9.1 31.12,53.98 34.29,53.98 36.2,52.07 36.2,43.81 33.66,41.27 VR2.1
N$8
  Top 0.508: C10.2 R4.1
N$21
  Top 0.508: D6.A 86.99,8.89 81.36,3.25 AR1.2
N$22
  Top 0.508: AR1.4 76.33,3.25 77.11,4.04 77.11,7.85 76.07,8.89 D8.A
N$23
  Top 0.508: AR1.3 78.74,7.75 79.88,8.89 D7.A
N$36
  Top 0.508: R13.2 50.19,36.88 50.19,43.89 50.73,44.42 D11.C
N$37
  Top 0.508: D12.C 50.8,50.8 48.89,48.9 R14.2
PA0_PRESSURE-SENSOR  (via drill 0.35)
  Top 0.508: U1.CN4_12 57.33,15.7 53.87,15.7 45.41,24.16 45.41,27.91 v45.38,27.94 | VR3.2 32.89,30.63 34.24,29.29 TP1.1 36.88,29.23 40.12,29.23 v41.31,28.04
  Bottom 0.508: v45.38,27.94 45.35,27.96 41.38,27.96 v41.31,28.04
PA1_FIRING-VALVE
  Top 0.508: U1.CN4_11 59.05,16.51 54.28,16.51 46.16,24.62 46.16,28.26 45.34,29.09 45.34,37.21 42.54,40.01 40,40.01 39.67,39.67 30.18,39.67 28.68,41.17 28.68,48.16 28.13,48.7 27.5,48.7 26.67,49.53 | AR3.4 18.41,29.21 16.51,31.11 16.51,48.26 16.95,48.7 25.84,48.7 26.67,49.53 | Q1.1 26.67,49.53
PA3_LED-GREEN  (via drill 0.35)
  Top 0.508: U1.CN4_10 66.04,12.06 U4.5 66.04,8.26 65.41,7.62 v62.23,7.62 | v55.88,7.62 54.61,6.35 31.56,6.35 26.5,11.4 24.6,11.4 22.23,13.78 22.23,19.05 20.32,20.95 Q4.1
  Bottom 0.508: v55.88,7.62 v62.23,7.62
PA4_LED-YELLOW  (via drill 0.35)
  Top 0.508: U4.4 67.31,13.34 U1.CN4_9 66.65,13.99 66.65,16.71 62.05,21.31 51.83,21.31 48.13,25.01 v48.13,25.91 | Q5.1 29.85,23.5 30.29,23.94 39.42,23.94 40.55,25.07 v40.55,25.9
  Bottom 0.508: v48.13,25.91 v40.56,25.91 v40.55,25.9
PA5_LED-RED  (via drill 0.35)
  Top 0.508: 68.58,10.12 U4.3 68.58,13.34 U1.CN4_8 67.79,15.39 67.79,16.79 62.46,22.12 51.95,22.12 49.25,24.83 49.25,25.94 v48.16,27.03 | v41.31,27.06 41.34,27.04 41.34,24.19 Q6.1
  Bottom 0.508: v41.31,27.06 41.35,27.03 v48.16,27.03
PA6_EXHAUST-BUTTON  (via drill 0.35)
  Top 0.508: U1.CN4_7 71.75,16.46 R3.1 R4.2 69.22,16.7 62.93,22.99 52.88,22.99 v52.35,23.52
  Bottom 0.508: v52.35,23.52 52.12,23.52 47.64,19.04 47.57,18.97 J1.9
PA7_EM.STOP
  Top 0.508: R9.1 C12.2 74.3,16.51 U1.CN4_6
PA8_PWR-INTAKE-VALVE  (via drill 0.35)
  Top 0.508: Q10.1 24.77,32.38 AR3.3 | U1.CN3_12 57.63,27.79 50.95,27.79 v48.89,29.84 | v30.33,33.33 32.2,35.19 35.29,35.19 40.64,29.84 v41.27,29.84
  Bottom 0.508: v48.89,29.84 v41.27,29.84 | Q10.1 29.39,32.38 v30.33,33.33
PA9_RESERVED-INPUT
  Top 0.508: C11.2 83.19,22.86 R8.1 84.45,26.67 U1.CN3_1
PA10_RESREVED-OUTPUT  (via drill 0.35)
  Top 0.508: U1.CN3_2 80.85,25.6 76.3,25.6 75.81,26.09 51.42,26.09 47.62,29.88 v47.62,60.96 | v43.18,60.96 Q8.1
  Bottom 0.508: v47.62,60.96 v43.18,60.96
PA11_CANRX
  Top 0.508: U4.1 71.12,10.04 72.69,11.61 88.11,11.61 89.28,12.77 89.28,30.52 88.33,31.47 76.05,31.47 75.56,30.99 66.04,30.99 65.41,31.62 | U1.CN3_13 56.52,29.59 57.89,30.96 64.75,30.96 65.41,31.62 | U5.4 61.69,48.78 63.07,47.41 63.07,42.11 62.03,41.07 62.03,36.52 65.41,33.15 65.41,31.62
PA12_CANTX  (via drill 0.35)
  Top 0.508: U4.2 69.85,10.79 71.42,12.37 87.78,12.37 88.49,13.08 88.49,30.23 88.06,30.66 77.6,30.66 76.83,29.9 U1.CN3_5 | v65.41,34.29 62.86,36.83 62.86,40.69 63.88,41.71 63.88,47.8 61.41,50.27 59.69,50.27 58.7,51.25 57.97,51.25 57.07,50.36 U5.1
  Bottom 0.508: U1.CN3_5 76.83,29.84 76,30.68 66.04,30.68 65.41,31.32 v65.41,34.29
PB0_TRIGGER  (via drill 0.35)
  Top 0.508: U1.CN3_6 74.3,29.17 76.8,26.67 R5.1 | v74.24,24.39 73.89,24.39 73.86,24.36 50.94,24.36 50.81,24.49 v50.7,24.49 | Q7.1 11.81,15.77 11.81,21.97 13.84,24 24.77,24 27.69,26.92 35.65,26.92 37.22,25.36 v37.48,25.36
  Bottom 0.508: U1.CN3_6 74.24,29.16 v74.24,24.39 | v50.7,24.49 50.42,24.21 38.63,24.21 v37.48,25.36
PB1_BUZZER  (via drill 0.35)
  Top 0.508: U4.6 64.77,11.43 63.63,12.57 50.09,12.57 49.75,12.92 49.75,17.46 v47.29,19.91 | v54.28,26.95 64.41,26.95 U1.CN3_9
  Bottom 0.508: v47.29,19.91 54.28,26.9 v54.28,26.95
PB3_EXHAUST-VALVE
  Top 0.508: U1.CN4_15 51.43,16.97 44.52,23.88 44.52,36.77 42.07,39.22 40.49,39.22 40,38.73 29.21,38.73 | AR3.2 24.13,29.84 25.07,30.79 28.17,30.79 28.57,31.19 28.57,38.1 29.21,38.73 | Q2.1 26.67,41.27 29.21,38.73
PB4_PWM-INTAKE-VALVE
  Top 0.508: R2.1 48.92,31.73 U1.CN3_15
PB5_INT-EM.STOP  (via drill 0.35)
  Top 0.508: 53.97,30.23 U1.CN3_14 53.97,30.02 55.7,31.75 63.63,31.75 R12.2 64.14,33.02 61.12,36.03 61.12,42.08 C14.2 61.59,43.13 57.5,47.23 56.46,47.23 55.98,47.71 55.98,51.11 54.69,52.4 54.69,57.15 55.88,58.34 v55.88,60.96 | J7.2 68.58,62.23 67.94,61.59 64.14,61.59 63.5,62.23 63.5,62.38 | 63.5,62.38 J7.6 | 63.5,62.38 63.07,61.95 62.42,61.95 61.51,61.03 v61.36,61.03
  Bottom 0.508: v55.88,60.96 55.95,61.03 v61.36,61.03
PRESSURE_2
  Top 0.508: VR3.3 30.35,29.08 29.01,27.74 12.14,27.74 J4.9
RED_2
  Top 1.27: Q6.2 36.83,16.51 42.49,10.85 J1.8
TRIGGER_1
  Top 0.508: Q7.2 8.45,11.11 6.93,9.6 J1.1 | 8.45,14.29 Q7.2 | Q7.2 8.45,14.8 10.79,17.14 10.79,22.23 R7.2 15.37,26.8 22.73,26.8 C15.2
YELLOW_2
  Top 1.27: Q5.2 27.3,16.51 32.33,11.48 J1.6

## Text on the board
SilkscreenTop: RES. OUTPUT | RES. INPUT | EM. STOP | EXT. 24V | FUSE | 24V | PA10 | PA9 | GND | PA7 | GND | 24V | GND | 24V | 24V | STRAIGHT OR / X-OVER CABLE | 24V | FIRING VALV. | PA1 | PCB DESIGNED FOR PNEUMATIC / BALLISTIC LAUNCHERS AT THE / ROYAL MILITARY ACADEMY OF / BELGIUM - BY DAVIDE DI VENTI | 24V | EXHAU. VALV. | TX | PB3 | PA8 | RX | INTAKE VAL. / TRIMMER | INTAKE VALVE | PB4 | GND | PRE.SENS. / TRIMMER | 24V | NUCLEO32 F303K8 | MAX 3V3 | PRESS. SENSOR | PA0 | Desolder & remove the / SB9 jumper from the / NUCLEO32 before use | GND | DESIGNED ON / 07.05.2025 - REV 1.2 / GUN CONTROL BOARD | GREEN | YELLOW | RED | PB0 | GND | 24V | PA3 | 24V | PA4 | 24V | PA5 | PA6 | GND | TRIGGER | GREEN | YELLOW | RED | EXHAUST BT.